# Altium PCB TPS40057.PcbDoc
Units mil, origin at the board's own origin, x right, y up, seen from the top; angles counter-clockwise.
Board outline 2215 x 1405.79 mil, 2 copper layers (Top Layer, Bottom Layer); 29 components, 18 nets, 75 pads, 193 vias.
Unrouted connection lines stored in the file: 2.
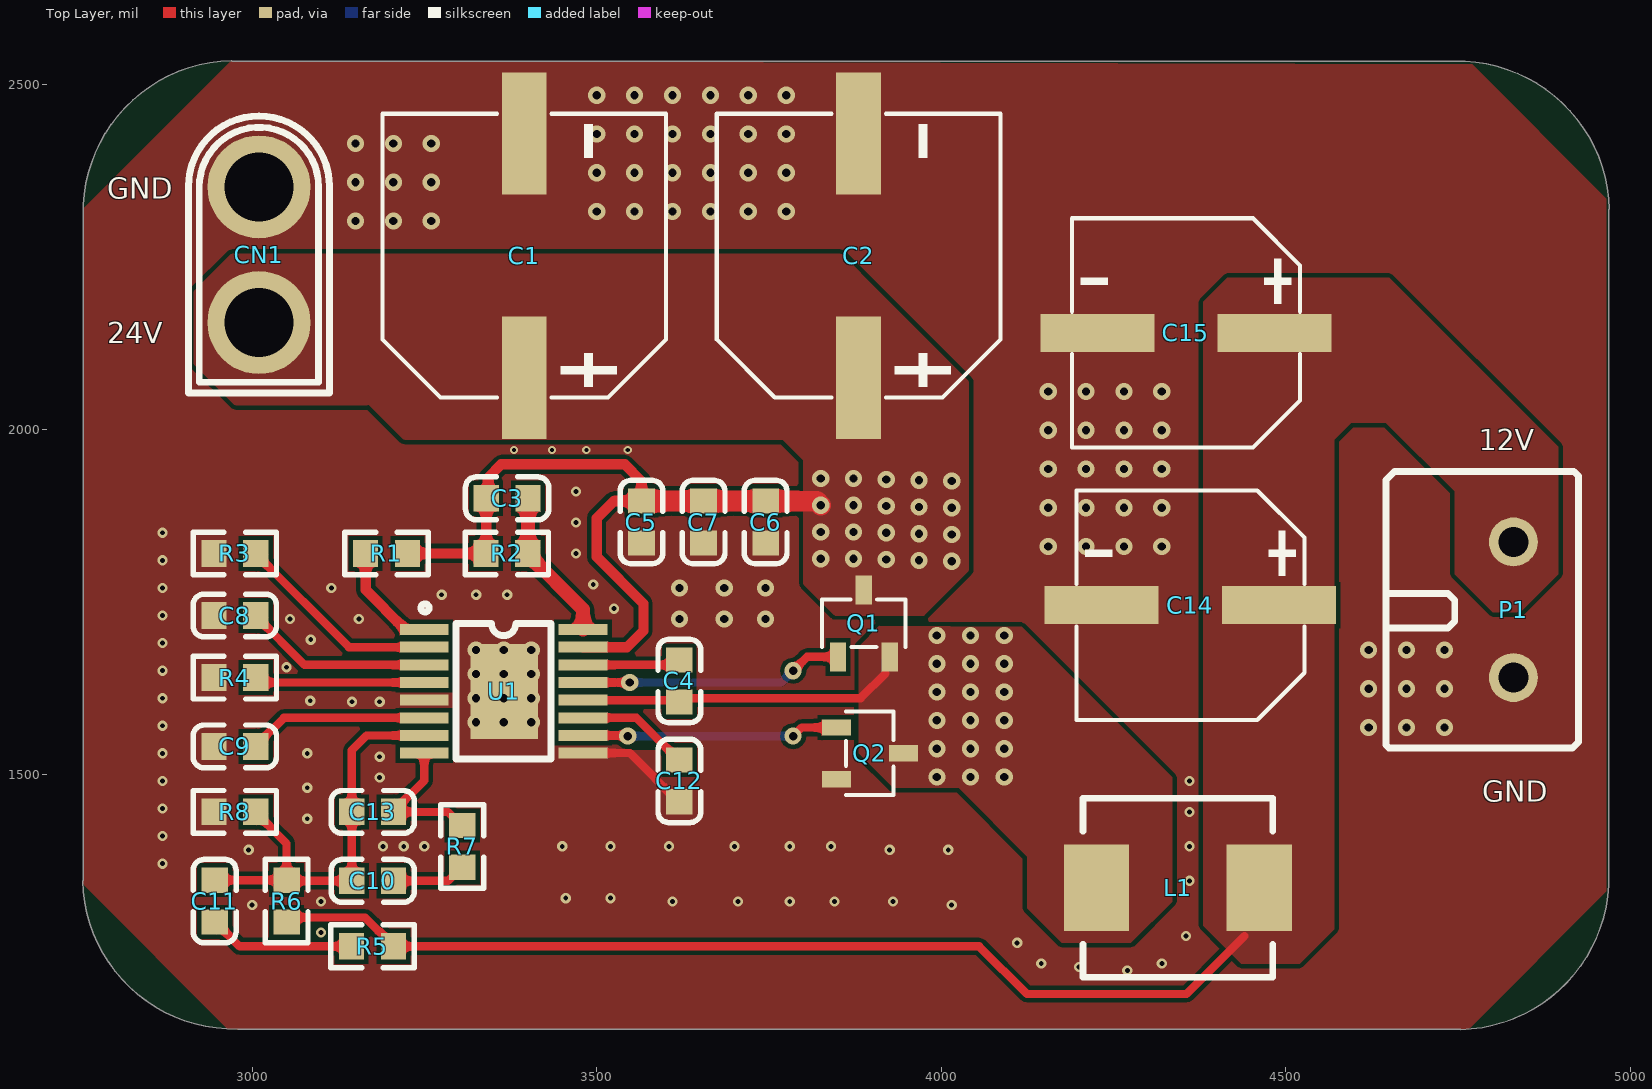
[diagram p0: Top Layer view]
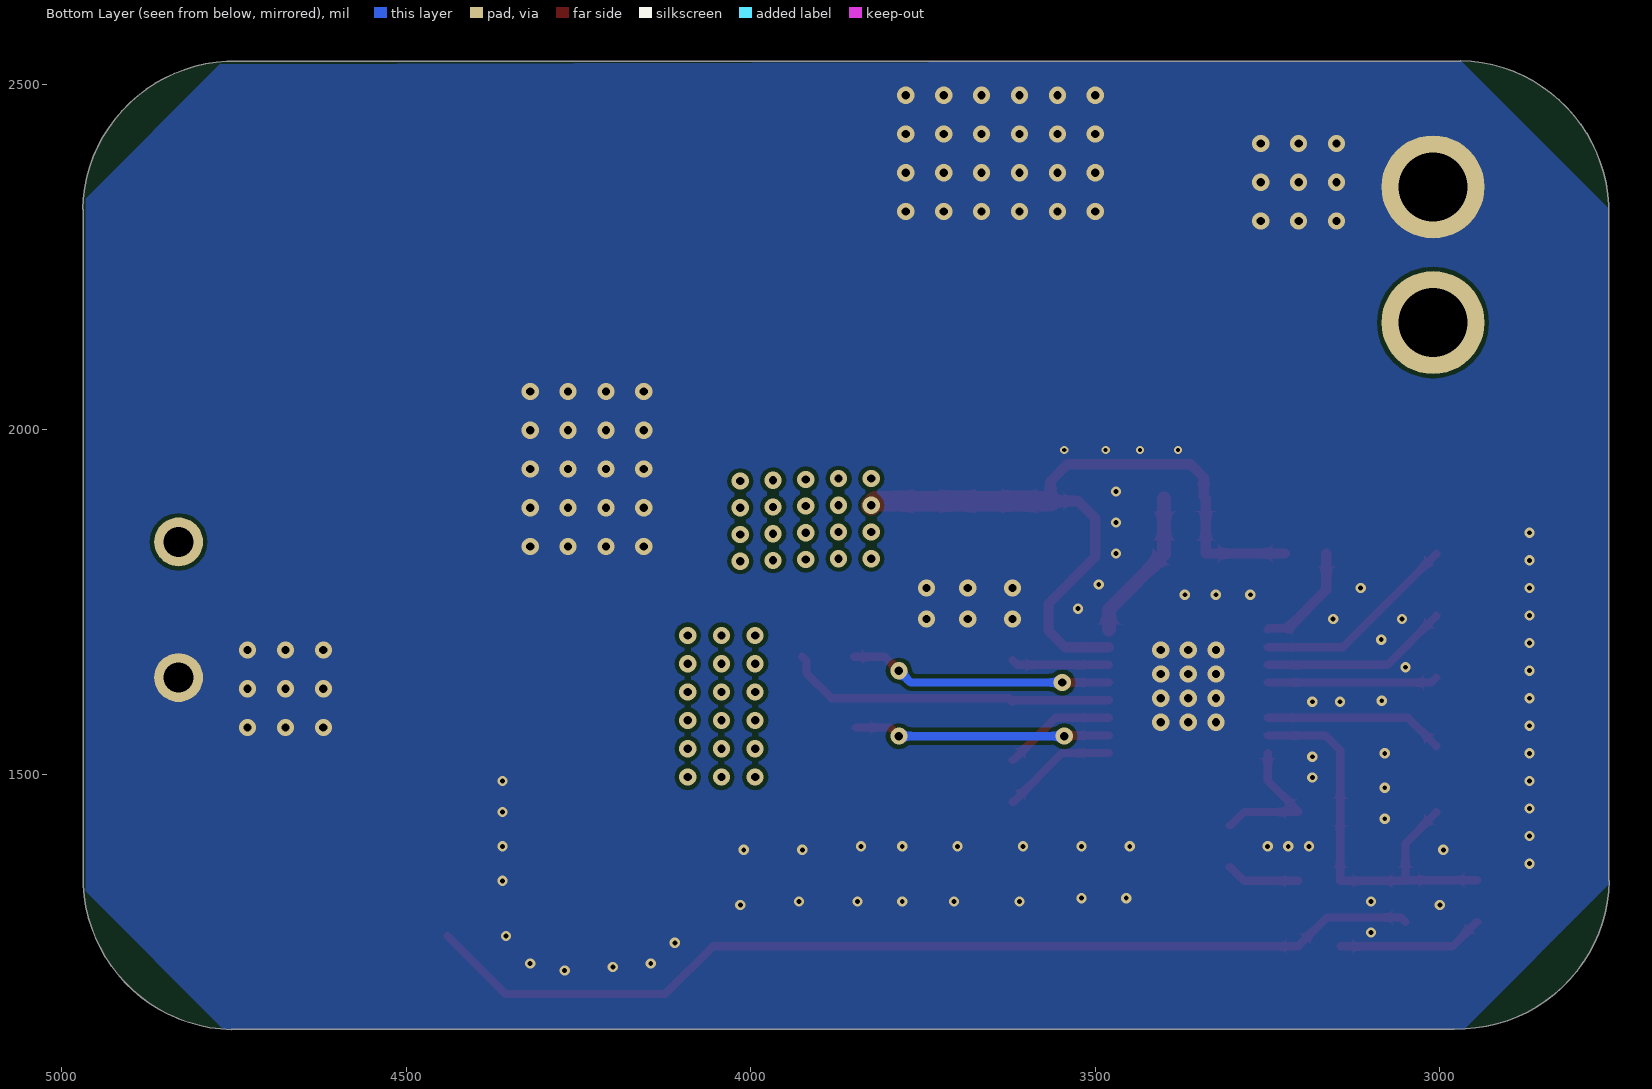
[diagram p1: Bottom Layer view, seen from below]
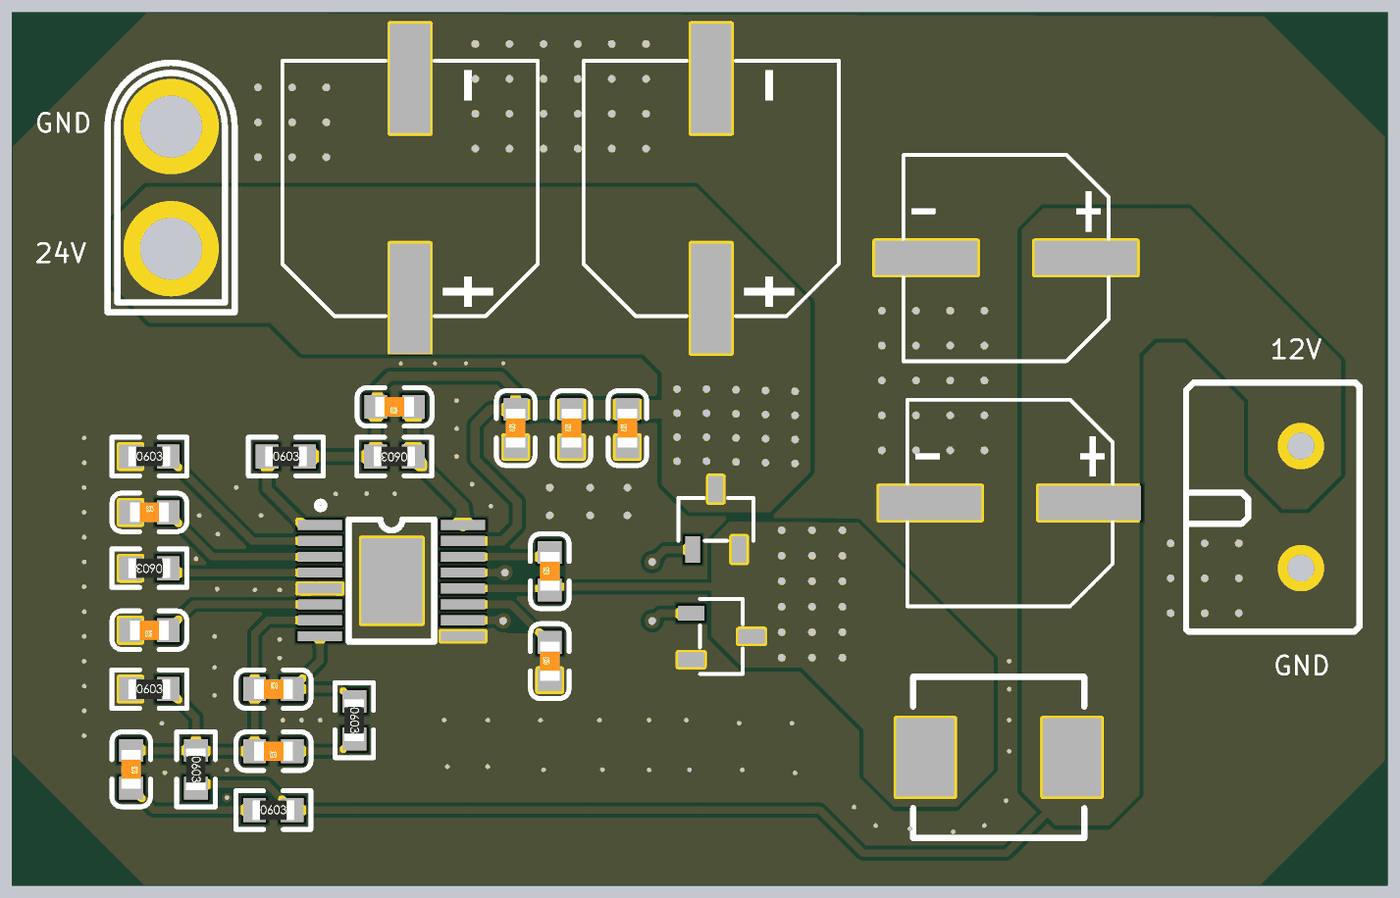
[diagram p2: 3D render of the assembled board from above, using the file's embedded part models]

## Layer stack, top to bottom
Top Solder: solder mask 0.4, Solder Resist, Dk 3.5
Top Layer: signal copper 1.4
Dielectric 1: dielectric 12.6, FR-4, Dk 4.8
Bottom Layer: signal copper 1.4
Bottom Solder: solder mask 0.4, Solder Resist, Dk 3.5

## Board outline
2755,1345.79 2755,2310 cw(c2975,2315) 2970,2535 2970.79,2534.21 4744.21,2534.21 cw(c4749.21,2314.21) 4969.21,2319.21 4968.43,2319.21 4968.43,1354.21 cw(c4748.43,1349.21) 4753.43,1129.21 4753.43,1130 2979.21,1130 cw(c2974.21,1350)

## Design rules (kind name [scope] priority, off if disabled: settings)
Clearance [All] p1: gap=6 ignorepadtopadclearanceinfootprint=FALSE
PlaneClearance [All] p1: clearance=12
PlaneConnect [All] p1: planeconnectstyle=Direct reliefexpansion=20 reliefentries=4 reliefconductorwidth=10 reliefairgap=10
PolygonConnect [All] p1: connectstyle=Direct reliefconductorwidth=10 reliefentries=4 polygonreliefangle="90 Angle" airgapwidth=10
RoutingVias [All] p1: holewidth=12 width=25 viastyle="Through Hole" minholewidth=4 minwidth=4 maxholewidth=80 maxwidth=80
SilkToSolderMaskClearance [IsPad] p1: minsilkscreentomaskgap=2 clearancetoexposedcopper=TRUE
SolderMaskExpansion [All] p1: expansion=4 istentingtop=FALSE
Width [All] p1: maxlimit=100 minlimit=6 preferedwidth=10
27 further rules are at their usual default settings.

## Components (designator, comment, footprint, x,y, rotation, side; value= is the part's Value field where it differs from the comment)
C1 "330uF (107) ±20% 35V" CAP-SMD_BD10.0-L10.3-W10.3-LS11.3-FD 3395,2252.16 r90 top value=330uF
C2 "330uF (107) ±20% 35V" CAP-SMD_BD10.0-L10.3-W10.3-LS11.3-FD 3880,2252.16 r90 top value=330uF
C3 "100pF/0603/50V" 0603_C 3370,1900 r180 top
C4 "0.1uF/0603/50V" 0603_C 3620,1635 r90 top
C5 "1uF/0603/ 50V" 0603_C 3565,1865.67 r90 top
C6 "22uF /0603/50V" 0603_C 3745,1865.67 r90 top
C7 "22uF /0603/50V" 0603_C 3655,1865.67 r90 top
C8 "1uF /0603/ /50V" 0603_C 2975,1730 r0 top
C9 "3.3uF /0603/50V" 0603_C 2975,1540 r180 top
C10 "330pF/ 0603/50V" 0603_C 3175,1345 r180 top
C11 "330pF/0603/50V" 0603_C 2945.67,1315.67 r270 top
C12 "1uF/0603/50V" 0603_C 3620,1490 r90 top
C13 "50pF/0603/50V" 0603_C 3175,1445 r0 top
C14 "180uF (107) ±20% 35V" CAP-SMD_BD8.0-L8.3-W8.3-FD 4361.37,1745 r180 top
C15 "180uF (107) ±20% 35V" CAP-SMD_BD8.0-L8.3-W8.3-FD 4355,2140 r180 top
CN1 "XT30 U-M" CONN-TH_XT30U-M 3010,2253.42 r90 top
L1 "3.3uH±10%" IND-SMD_L7.0-W6.6 4225,1335 r0 top
P1 "KF301 2P" "KF301 2P" 4830,1836.85 r270 top
Q1 "ST3422A N道沟 SOT-23" SOT-23-3_L2.9-W1.6-P1.90-LS2.8-BR 3887.6,1718.62 r270 top
Q2 "ST3422A N道沟 SOT-23" SOT-23-3_L2.9-W1.6-P1.90-LS2.8-BR 3896.38,1530 r180 top
R1 "82KΩ /0603/±1%" 0603_R 3195,1820 r0 top
R2 "18KΩ/0603/±1%" 0603_R 3369.69,1820 r180 top
R3 "47KΩ/0603/±1%" 0603_R 2975,1820 r0 top
R4 "1KΩ /0603/ ±1%" 0603_R 2975,1640 r180 top
R5 "22KΩ/0603/±1%" 0603_R 3174.68,1250 r0 top
R6 "100KΩ/0603/±1%" 0603_R 3050,1315.67 r270 top
R7 "140KΩ / 0603/±1%" 0603_R 3305,1395 r270 top
R8 "6.2KΩ/0603/±1%" 0603_R 2975,1445 r0 top
U1 "TPS40057PWP" TSSOP-16_L5.0-W4.4-P0.65-LS6.4-BL-EP 3365,1620 r270 top

## Footprints (in the part's own frame and the unit in brackets; to place one, negate y for a bottom-side part, rotate by r counter-clockwise, add the part's x,y. Pads: shape width x height; smd on the part's side, far side on the other; paste and mask are expansions set on the pad)
0603_C [mm]
  rect 0.93x0.98 smd: 1(-0.77,0) 2(0.77,0)
  silkscreen extent -1.53,-0.79 1.54,0.79, body extent -0.8,-0.4 0.8,0.4, height 0.3
0603_R [mm]
  rect 0.93x0.98 smd: 1(-0.77,0) 2(0.77,0)
  silkscreen extent -1.53,-0.79 1.54,0.79, body extent -0.85,-0.4 0.85,0.4, height 0.56
CAP-SMD_BD8.0-L8.3-W8.3-FD [mm]
  rect 4.2x1.4 smd: 1(-3.267,0) 2(3.267,0)
  silkscreen extent -4.2,-4.23 4.2,4.23
CAP-SMD_BD10.0-L10.3-W10.3-LS11.3-FD [mm]
  rect 4.5x1.65 smd: 1(-4.5,0) 2(4.5,0)
  silkscreen extent -5.23,-5.23 5.23,5.23
CONN-TH_XT30U-M [mm]
  round 3.8 hole 2.54 paste+0 mask+0.05: 1(-2.5,0) 2(2.5,0)
  silkscreen extent -5.1,-2.6 5.11,2.6
IND-SMD_L7.0-W6.6 [mm]
  rect 2.4x3.2 smd: 1(0,0) 2(6,0)
  silkscreen extent -0.5,-3.3 6.5,3.3
"KF301 2P" [mm]
  round 1.8 hole 1.1 paste+0 mask+0.051: 1(0,0) 2(5,0)
  silkscreen extent -2.6,-4.7 7.6,2.4
SOT-23-3_L2.9-W1.6-P1.90-LS2.8-BR [mm]
  rect 1.07x0.6 smd: 1(1.235,-0.95) 2(1.235,0.95) 3(-1.235,0)
  silkscreen extent -0.88,-1.54 0.88,1.54, body extent -0.9,-1.55 0.9,1.55, height 1.25
TSSOP-16_L5.0-W4.4-P0.65-LS6.4-BL-EP [mil]
  rect 16x71 smd paste+0 mask+4: 1(-89.57,-115.16) 2(-63.97,-115.16) 3(-38.38,-115.16) 4(-12.8,-115.16) 5(12.8,-115.16) 6(38.39,-115.16) 7(63.97,-115.16) 8(89.57,-115.16) 9(89.57,115.16) 10(63.97,115.16) 11(38.38,115.16) 12(12.8,115.16) 13(-12.8,115.16) 14(-38.39,115.16) 15(-63.97,115.16) 16(-89.57,115.16)
  rect 138x98 smd paste+0 mask+4: 17(0.46,0.58)
  silkscreen extent -127,-120 98,69

## Part data
C1 C2: "电解电容", Equivalent Series Resistance(ESR)=-, JLCPCB Part Class="Extended Part", LCSC Part Name="330uF ±20% 35V", Lifetime @ Temp=2000hrs@105℃, Manufacturer=ROQANG(容强), Manufacturer Part=RVT1V331M1010, Operating Temperature=-45℃~+105℃, Rated Voltage=35V, Tolerance=±20%, Add into BOM=yes, Convert to PCB=yes, Datasheet=https://atta.szlcsc.com/upload/public/pdf/source/20170217/1487312292321.pdf, Device=RVT1V331M1010, L=10.2mm, Name=330uF, Ripple Current=-, Supplier=LCSC, Supplier Footprint=SMD,D10xL10.2mm, Supplier Part=C72510, Symbol=RVT1V331M1010-C72510, φD=10mm
C3 C4 C5 C6 C7 C8 C9 C10 C11 C12 C13: library part "0603 22pF (220) 5% 50V", "贴片电容", Package=0603, SuppliersPartNumber=C1653, ComponentLink1Description=供应商链接, ComponentLink1URL=http://www.szlcsc.com/product/details_2005.html, Supplier=LC
C14 C15: "电解电容"
CN1: "模型插头轻量版锂电池插头"
L1: library part "0805 3.3uH10%", "贴片电感", Package=0805, SuppliersPartNumber=C51725, ComponentLink1Description=供应商链接, ComponentLink1URL=http://www.szlcsc.com/product/details_52738.html, Supplier=LC
P1: "电源插针"
Q1 Q2: library part "ST3422A N道沟  SOT-23", "MOS(场效应管)", Package=SOT-23, SuppliersPartNumber=C20917, ComponentLink1Description=供应商链接, ComponentLink1URL=http://www.szlcsc.com/product/details_21629.html, Supplier=LC
R1 R2 R3 R4 R5 R6 R7 R8: library part "0603 10KΩ (1002) 1%_1", "贴片电阻", Package=0603, SuppliersPartNumber=C25804, ComponentLink1Description=供应商链接, ComponentLink1URL=http://www.szlcsc.com/product/details_26547.html, Supplier=LC
U1: library part TPS40057PWPR, "电源IC", Input Voltage=8V~40V, JLCPCB Part Class="Extended Part", LCSC Part Name="降压型 8V~40V 1MHz", Manufacturer=TI(德州仪器), Operating Temperature=-40℃~+85℃@(TA), Switching Frequency=1MHz, Add into BOM=yes, Convert to PCB=yes, Datasheet=https://www.ti.com/cn/lit/gpn/tps40054, Device=TPS40057PWP, Duty Cycle (Max)=94%, Function=降压型, Manufacturer Part=TPS40057PWP, Name=TPS40057PWP, Number of Outputs=1, Supplier=LCSC, Supplier Footprint=TSSOP-16-EP, Supplier Part=C1529919, Symbol=TPS40057PWP, Synchronous Rectification=是, Topology=降压式

## Via types
v1: diameter 25, hole 12, Top Layer to Bottom Layer, tented both sides, 122 vias
v2: diameter 15, hole 7, Top Layer to Bottom Layer, tented both sides, 67 vias
v3: diameter 12, hole 6, Top Layer to Bottom Layer, tented both sides, 4 vias

## Nets (pads, with @x,y where several pads share a name; then routed paths per layer and width w, separated by ;. In a path a pad name is that pad's centre, name@x,y a point inside that pad or via, vN(x,y) a via of type N, cw(c..) or ccw(c..) an arc to the next point about the centre after c; other vN are vias at no path point)
12V: C14.1 C15.1 L1.2 P1.1 R5.2 R6.2 | length 1474.1
  Top Layer w12: R6.2 3056.52,1291.88 3164.11,1291.88 3205,1250.98 R5.2 4055,1250 4124.17,1180.83 4355.83,1180.83 4440,1265
24V: C1.1 C2.1 C3.2 C5.2 C6.2 C7.2 CN1.1 Q1.3 R1.2 R2.2 U1.15 | length 1121.9
  Top Layer w12: R2.2 R2.2@3339.68,1820.32 ; C3.2 C3.2@3342.64,1902.96
  Top Layer w15: R1.2 R2.2 ; R2.2@3339.68,1820.32 C3.2 ; C3.2@3342.64,1902.96 3342.64,1930.26 3361.69,1949.31 3540.69,1949.31 3565,1925 C5.2 3524.67,1895.98 3500,1871.31 3500,1815 3567.87,1747.13 3567.87,1707.87 3543.97,1683.97 U1.15
  Top Layer w30: C5.2 C7.2 C6.2 3819.02,1895.98 v1(3825,1890)
  other v1: 4015,1808.75 3967.5,1810 3920,1811.25 3825,1812.5 3872.5,1812.5 4015,1847.5 3967.5,1848.75 3920,1850 3825,1851.25 3872.5,1851.25 4015,1886.25 3967.5,1887.5 3920,1888.75 3872.5,1890 4015,1925 3967.5,1926.25 3920,1927.5 3825,1928.75 3872.5,1928.75
GND: C1.2 C2.2 C5.1 C6.1 C7.1 C8.1 C9.2 C12.1 C14.2 C15.2 CN1.2 P1.2 Q2.2 R3.1 R4.2 R8.1 U1.5 U1.9 U1.17 | length 169.1
  Top Layer w12: U1.9 3548.27,1530.43 3619.02,1459.68 C12.1
  other v1: 4620,1567.5 4675,1567.5 4730,1567.5 3325,1575 3365,1575 3405,1575 3325,1610 3365,1610 3405,1610 4620,1623.75 4675,1623.75 4730,1623.75 3325,1645 3365,1645 3405,1645 3325,1680 3365,1680 3405,1680 4620,1680 4675,1680 4730,1680 3620,1725 3685,1725 3745,1725 3620,1770 3685,1770 3745,1770 4155,1830 4210,1830 4265,1830 4320,1830 4155,1886.25 4210,1886.25 4265,1886.25 4320,1886.25 4155,1942.5 4210,1942.5 4265,1942.5 4320,1942.5 4155,1998.75 4210,1998.75 4265,1998.75 4320,1998.75 4155,2055 4210,2055 4265,2055 4320,2055 3150,2302.5 3205,2302.5 3260,2302.5 3500,2316.25 3555,2316.25 3610,2316.25 3665,2316.25 3720,2316.25 3775,2316.25 3150,2358.75 3205,2358.75 3260,2358.75 3500,2372.5 3555,2372.5 3610,2372.5 3665,2372.5 3720,2372.5 3775,2372.5 3150,2415 3205,2415 3260,2415 3500,2428.75 3555,2428.75 3610,2428.75 3665,2428.75 3720,2428.75 3775,2428.75 3500,2485 3555,2485 3610,2485 3665,2485 3720,2485 3775,2485
  other v2: 4270,1215 4200,1220 4145,1225 4320,1225 4110,1255 4355,1265 3100,1270 3000,1310 4015,1310 3100,1315 3610,1315 3705,1315 3780,1315 3845,1315 3930,1315 3455,1320 3520,1320 4360,1345 2870,1370 2995,1390 3925,1390 4010,1390 3190,1395 3220,1395 3250,1395 3450,1395 3520,1395 3605,1395 3700,1395 3780,1395 3840,1395 4360,1395 2870,1410 3080,1435 4360,1445 2870,1450 3080,1480 2870,1490 4360,1490 3185,1495 3185,1525 2870,1530 3080,1530 2870,1570 3145,1605 3185,1605 3084.26,1606.32 2870,1610 2870,1650 3050,1655 2870,1690 3085,1695 3055,1725 3155,1725 2870,1730 3525,1740 3275,1760 3325,1760 3370,1760 2870,1770 3115,1770 3495,1775 2870,1810 3470,1820 2870,1850 3470,1865 3470,1910
  other v3: 3380,1970 3435,1970 3485,1970 3545,1970
NetC3_1: C3.1 R2.1 U1.16 | length 223.8
  Top Layer w12: R2.1@3400,1819.02 R2.1 R2.1@3400.32,1820.32
  Top Layer w20: R2.1@3400,1819.02 3480.16,1738.86 U1.16 ; R2.1@3400.32,1820.32 C3.1
NetC4_1: C4.1 L1.1 Q1.2 Q2.3 U1.12 | length 482.4
  Top Layer w12: U1.12 C4.1@3620,1607.2 ; C4.1 3625.32,1610 3882.98,1610 3919.19,1646.21 3919.19,1664.19 Q1.2
  other v1: 3993.56,1495.69 4042.5,1495.69 4091.44,1495.69 3993.56,1536.77 4042.5,1536.77 4091.44,1536.77 3993.56,1577.84 4042.5,1577.84 4091.44,1577.84 3993.56,1618.92 4042.5,1618.92 4091.44,1618.92 3993.56,1660 4042.5,1660 4091.44,1660 3993.56,1701.08 4042.5,1701.08 4091.44,1701.08
NetC4_2: C4.2 U1.14 | length 142.7
  Top Layer w12: U1.14 3613.07,1658.38 C4.2
NetC8_2: C8.2 U1.3 | length 274.8
  Top Layer w12: C8.2 3005.32,1729.02 3075.95,1658.38 U1.3
NetC9_1: C9.1 U1.6 | length 262.3
  Top Layer w12: C9.1 3005.32,1540.98 3045.95,1581.62 U1.6
NetC10_1: C10.1 R7.2 | length 107.8
  Top Layer w12: C10.1 3284.33,1345 3304.02,1364.68 R7.2
NetC10_2: C10.2 C11.1 C13.1 R6.1 R8.2 U1.7 | length 620.6
  Top Layer w12: C11.1 R6.1 ; R8.2 3005.32,1444.02 3050,1399.33 R6.1 ; U1.7 3166.03,1556.03 3144.68,1534.68 C13.1 C10.2 3050.98,1345 R6.1
NetC11_2: C11.2 R5.1 | length 213.3
  Top Layer w12: C11.2 2946.65,1285.35 2982.01,1250 R5.1
NetC12_2: C12.2 U1.11 | length 165.2
  Top Layer w12: U1.11 3557.72,1581.62 3619.02,1520.32 C12.2
NetC13_2: C13.2 R7.1 U1.8 | length 211.7
  Top Layer w12: U1.8 3249.84,1490.51 3205.31,1445.98 C13.2 3284.33,1445 3304.02,1425.31 R7.1
NetQ1_1: Q1.1 U1.13 | length 388.6
  Top Layer w12: U1.13 v1(3547.8,1632.8) v1@3550,1635 ; v1(3785,1650) 3805,1670 Q1.1
  Bottom Layer w12: v1(3547.8,1632.8) 3767.8,1632.8 v1(3785,1650)
NetQ2_1: Q2.1 U1.10 | length 373.2
  Top Layer w12: U1.10 3543.97,1556.03 v1(3545,1555) ; v1(3785,1555) 3797.4,1567.4 Q2.1
  Bottom Layer w12: v1(3545,1555) v1(3785,1555)
NetR1_1: R1.1 U1.1 | length 161.8
  Top Layer w12: U1.1@3220.34,1711.57 3247.84,1711.57 U1.1
  Top Layer w15: R1.1 3164.69,1767.22 U1.1@3220.34,1711.57
NetR3_2: R3.2 U1.2 | length 301.4
  Top Layer w12: R3.2 3005.32,1819.02 3140.36,1683.97 U1.2
NetR4_1: R4.1 U1.4 | length 247.5
  Top Layer w12: R4.1 3012.52,1632.8 U1.4

## Polygon pours and split planes (outlines as drawn)
24V on Top Layer "24V_L01_P001" (solid, remove dead copper, pour order 1): 2915,2200 2970,2255 3855,2255 4040,2070 4040,1795 3975,1730 3845,1730 3800,1775 3800,1955 3770,1985 3220,1985 3170,2035 2975,2035 2915,2095
GND on Top Layer "GND_L01_P005" (solid, remove dead copper, pour order 5): 2970,2535 2755,2320 2755,1340 2965,1130 4765,1130 4965,1330 4965,2335 4770,2530
12V on Top Layer "12V_L01_P004" (solid, remove dead copper, pour order 4): 4435,1225 4380,1280 4380,2185 4415,2220 4650,2220 4895,1975 4895,1790 4840,1735 4800,1735 4745,1790 4745,1910 4645,2010 4595,2010 4570,1985 4570,1275 4520,1225
NetC4_1 on Top Layer "NETC4_1_L01_P002" (solid, remove dead copper, pour order 2): 3910,1715 3880,1685 3880,1530 3930,1480 4025,1480 4125,1380 4125,1305 4175,1255 4275,1255 4335,1315 4335,1495 4116.47,1713.53
GND on Bottom Layer "GND_L02_P006" (solid, remove dead copper, pour order 6): 2970,2535 2755,2320 2755,1340 2965,1130 4765,1130 4965,1330 4965,2335 4770,2530

## Other copper
Top Layer:
  pour cut-out: 3545,1536.14 3546.14,1535 3587.03,1535 3568.64,1553.39
  pour cut-out: 3560,1655 3560,1615 3565,1610 3571.92,1616.92 3645.29,1616.92 3645.29,1654.71 3645,1655

## Silkscreen, mask and mechanical layers (free items; w line width, h text height)
Top Overlay:
  text "GND" at 2790,2335 h30
  text "24V" at 2790,2125 h30
  text "12V" at 4780,1970 h30
  text "GND" at 4785,1460 h30
Mechanical 1:
  lines w10: 2754.21,1345 ccw(c2974.21,1350) 2979.21,1130 4753.43,1130 ; 2755,1345.79 2755,2310 cw(c2975,2315) 2970,2535 ; 2970.79,2534.21 4744.21,2534.21 cw(c4749.21,2314.21) 4969.21,2319.21 ; 4753.43,1129.21 ccw(c4748.43,1349.21) 4968.43,1354.21 4968.43,2319.21